# Altium PCB PCB2.PcbDoc
Units mil, origin at the board's own origin, x right, y up, seen from the top; angles counter-clockwise.
Board outline 6000 x 4000 mil, 2 copper layers (Top Layer, Bottom Layer); 6 components, 7 nets, 42 pads, 0 vias.
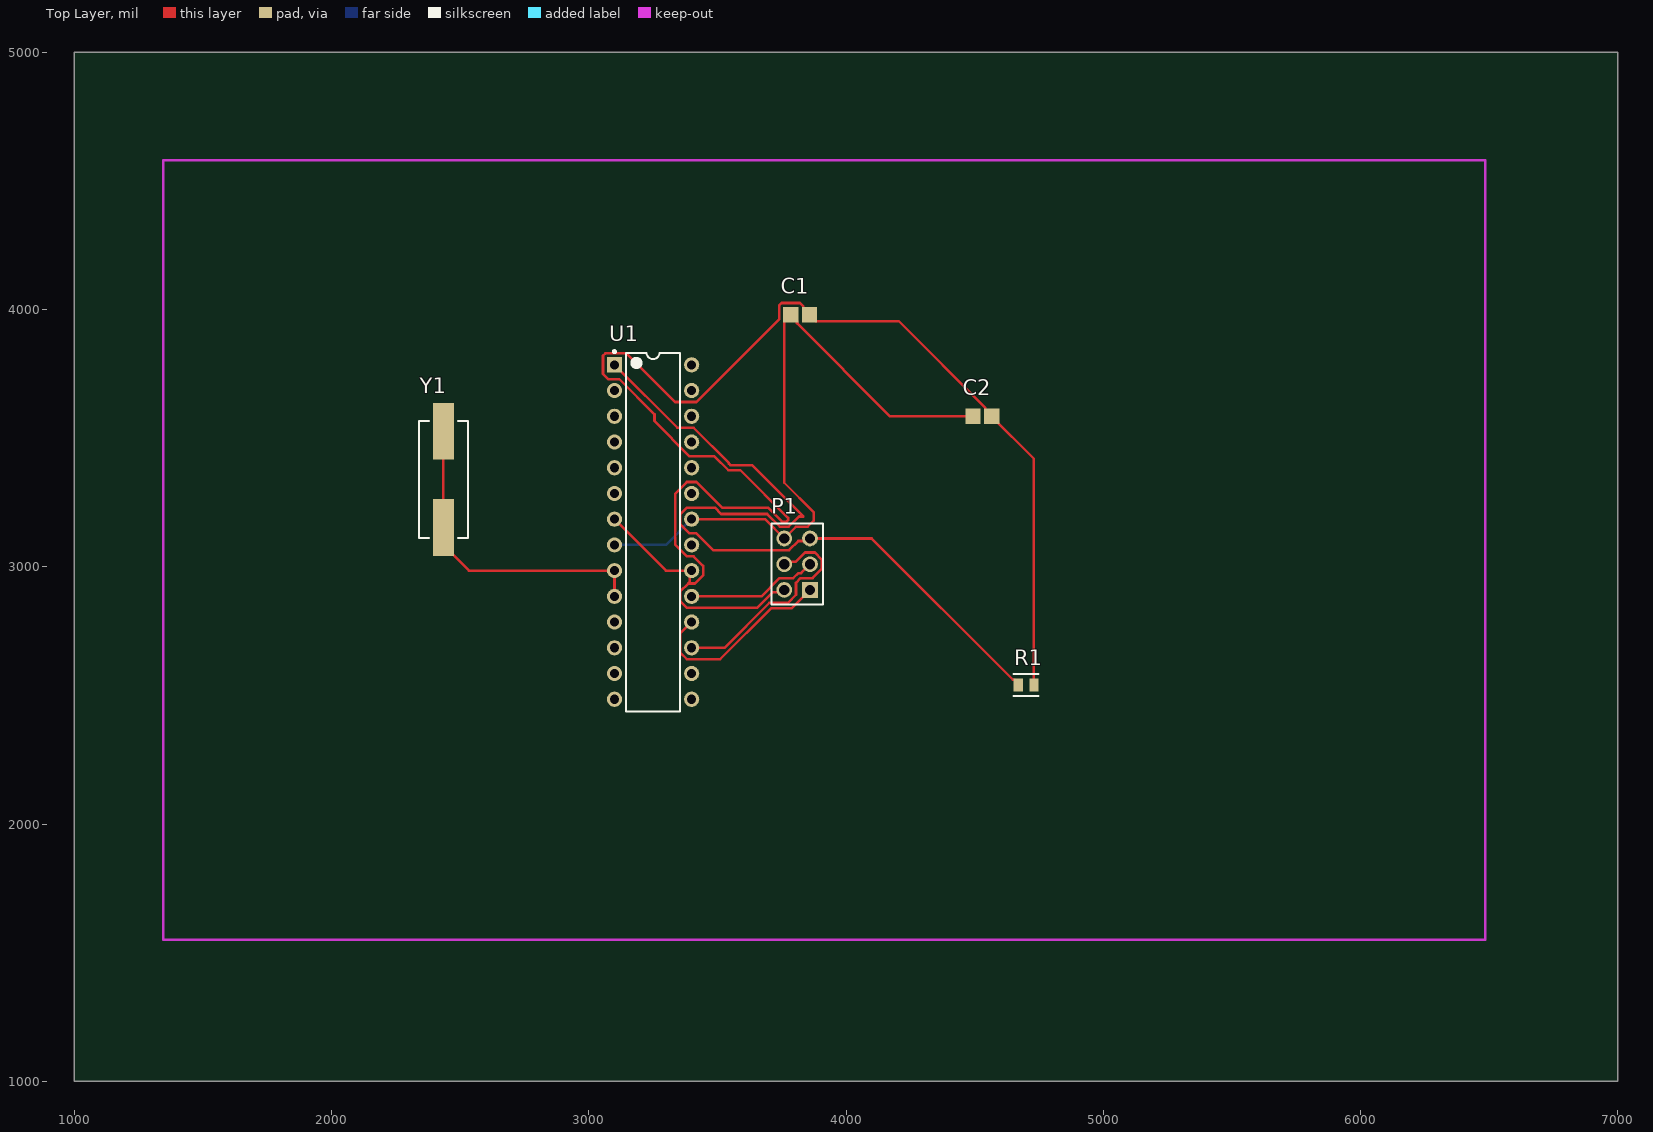
[diagram p0: Top Layer view]
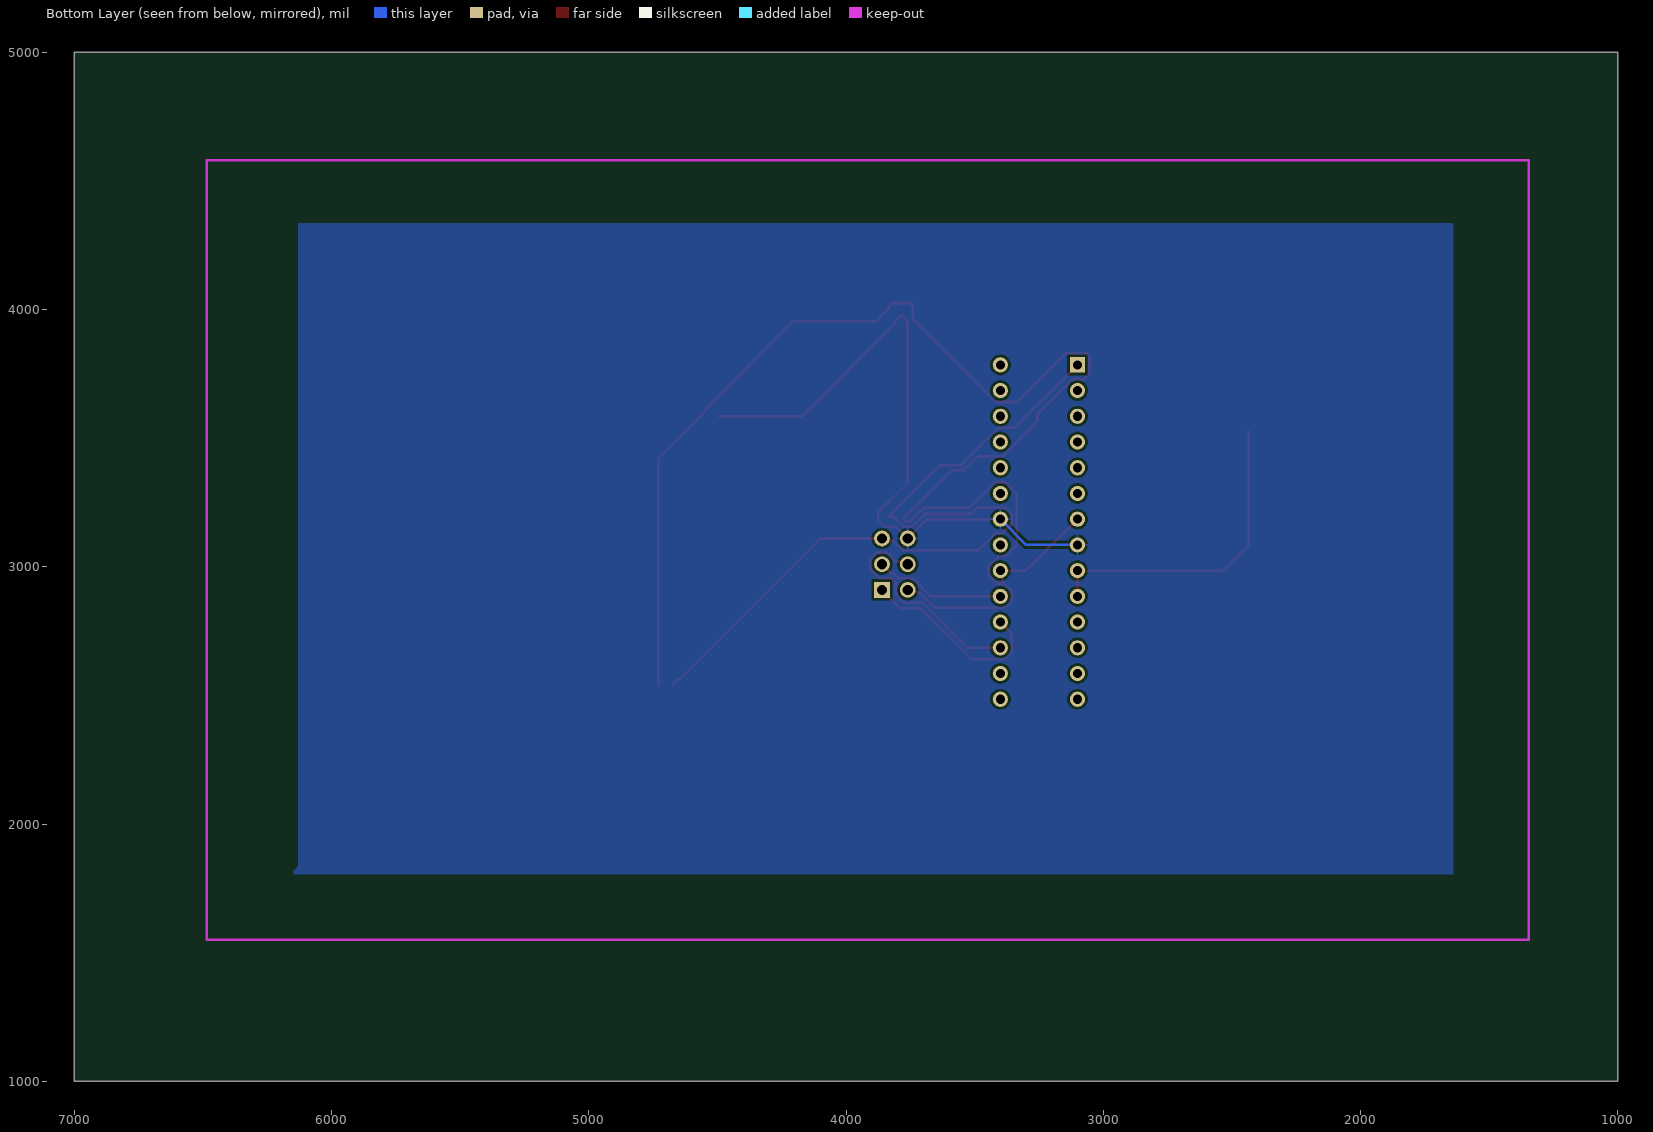
[diagram p1: Bottom Layer view, seen from below]
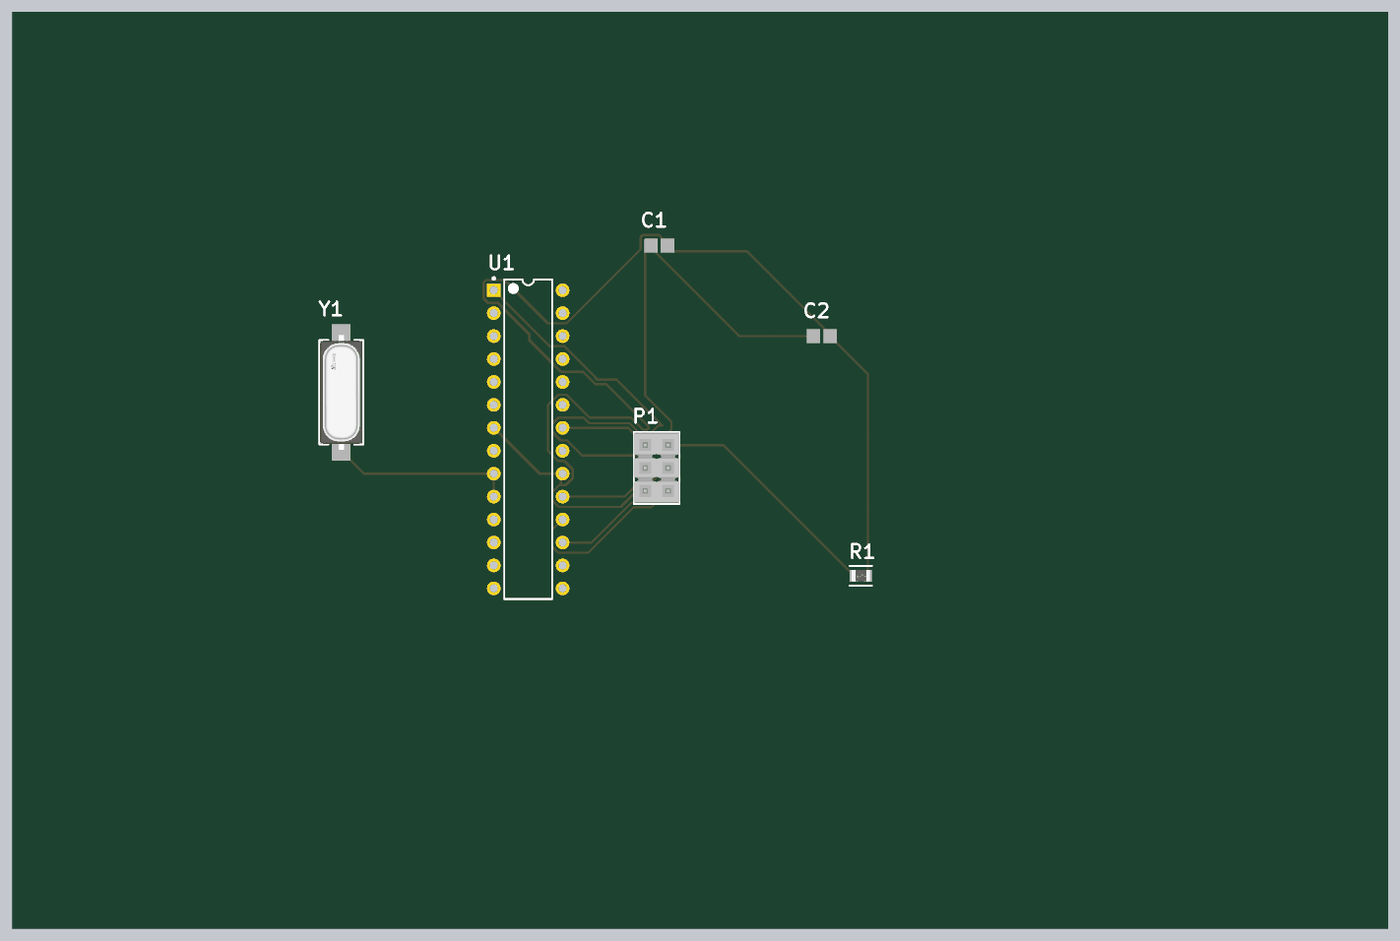
[diagram p2: 3D render of the assembled board from above, using the file's embedded part models]

## Layer stack, top to bottom
Top Solder: solder mask 0.4, Solder Resist, Dk 3.5
Top Layer: signal copper 1.4
Dielectric 1: dielectric 12.6, FR-4, Dk 4.8
Bottom Layer: signal copper 1.4
Bottom Solder: solder mask 0.4, Solder Resist, Dk 3.5

## Board outline
1000,1000 7000,1000 7000,5000 1000,5000

## Design rules (kind name [scope] priority, off if disabled: settings)
Clearance [All] p1: gap=10 ignorepadtopadclearanceinfootprint=FALSE
PolygonConnect [All] p1: connectstyle=Relief reliefconductorwidth=10 reliefentries=4 polygonreliefangle="90 Angle" airgapwidth=10
RoutingVias [All] p1: holewidth=28 width=50 viastyle="Through Hole" minholewidth=28 minwidth=50 maxholewidth=28 maxwidth=50
SolderMaskExpansion [All] p1: expansion=0 istentingtop=FALSE
SupplyNets "Schematic Supply Nets_1" [InNet('GND')] p1: voltage=0.000
SupplyNets "Schematic Supply Nets" [InNet('VCC')] p2: voltage=0.000
Width [All] p1: maxlimit=10 minlimit=10 preferedwidth=10
30 further rules are at their usual default settings.

## Components (designator, comment, footprint, x,y, rotation, side; value= is the part's Value field where it differs from the comment)
C1 "VJ0805Y104JXAAT" CAPC2013X145X48ML20T23 3821.42,3980 r0 top
C2 "VJ0805Y104JXAAT" CAPC2013X145X48ML20T23 4530,3585 r0 top
P1 "TSW-103-08-T-D" SMTC-TSW-103-08-X-D 3860,2910 r90 top
R1 "CRGCQ0805J10K" FP-CRGCQ0805-IPC_C 4700,2540 r0 top value=10KΩ
U1 "ATmega328P-PU" 28P3 3250,3135 r0 top
Y1 "ABLS-16.000MHZ-K4T" FP-ABLS-MFG 2435,3340 r90 top

## Footprints (in the part's own frame and the unit in brackets; to place one, negate y for a bottom-side part, rotate by r counter-clockwise, add the part's x,y. Pads: shape width x height; smd on the part's side, far side on the other; paste and mask are expansions set on the pad)
28P3 [mm] "28-Pin Plastic Dual In-Line Package (PDIP)"
  rect 1.5x1.5 hole 0.9: 1(-3.81,16.51)
  round 1.5 hole 0.9: 2(-3.81,13.97) 3(-3.81,11.43) 4(-3.81,8.89) 5(-3.81,6.35) 6(-3.81,3.81) 7(-3.81,1.27) 8(-3.81,-1.27) 9(-3.81,-3.81) 10(-3.81,-6.35) 11(-3.81,-8.89) 12(-3.81,-11.43) 13(-3.81,-13.97) 14(-3.81,-16.51) 15(3.81,-16.51) 16(3.81,-13.97) 17(3.81,-11.43) 18(3.81,-8.89) 19(3.81,-6.35) 20(3.81,-3.81) 21(3.81,-1.27) 22(3.81,1.27) 23(3.81,3.81) 24(3.81,6.35) 25(3.81,8.89) 26(3.81,11.43) 27(3.81,13.97) 28(3.81,16.51)
  silkscreen extent -3.93,-17.7 2.65,17.93, body extent -3.6,-17.65 3.6,17.65, height 4.58
CAPC2013X145X48ML20T23 [mm] "Chip Capacitor, 2-Leads, Body 2.00x1.25mm, IPC Low Density"
  rect 1.5x1.55 smd: 1(-0.925,0) 2(0.925,0)
  body extent -1.1,-0.72 1.1,0.72, height 1.45
FP-ABLS-MFG [mm]
  rect 5.6x2.1 smd paste+0 mask+0: 1(-4.75,0) 2(4.75,0)
  silkscreen extent -5.77,-2.42 5.77,2.42, body extent -7.65,-2.52 7.65,2.52, height 0.25
FP-CRGCQ0805-IPC_C [mil]
  rect 35.67x51.57 smd paste+0 mask+0: 1(-30.55,0) 2(30.55,0)
  silkscreen extent -48,-43 48,43, body extent -52,-31 52,31, height 10
SMTC-TSW-103-08-X-D [mm] ".025 SQ Post Terminal Strip Assembly, 2x3 Pins, Vertical, 2.54mm Pitch, Male"
  rect 1.55x1.55 hole 1.02: 1(0,0)
  round 1.55 hole 1.02: 2(0,2.54) 3(2.54,0) 4(2.54,2.54) 5(5.08,0) 6(5.08,2.54)
  silkscreen extent -1.46,-1.27 6.54,3.81, body extent -1.27,-1.27 6.35,3.81, height 8.38

## Part data
C1 C2: library part CMP-2007-03164-1, Manufacturer=Vitramon, Part Number=VJ0805Y104JXAAT
P1: library part CMP-1024-00335-1, "0.025\" SQ Post Header, Through-hole, Vertical, -55 to 105 degC, 2.54 mm Pitch, 6-Pin, Male, RoHS", Manufacturer=Samtec, Temperature Range="-55 to 105 degC", ComponentLink1Description="Manufacturer URL", ComponentLink1URL=http://www.samtec.com, ComponentLink2Description=Datasheet, ComponentLink2URL=http://www.samtec.com/documents/webfiles/pdf/TSW_TH.PDF, ComponentLink3Description="Package Specification", ComponentLink3URL=http://www.samtec.com/documents/webfiles/cpdf/TSW-XXX-XX-XXX-X-XX-XXX-MKT.pdf, DatasheetVersion=F-214, Mounting Technology=Through-hole, Orientation=Vertical, PackageDescription=".025[0.64] SQ. Post Terminal Strip Assembly", PackageReference=TSW-103-08-X-D, PackageVersion="DM, 8/1988", PartNumber=TSW-103-08-T-D, Pitch="2.54 mm", RoHS=True
R1: library part CMP-03211-002989-1, "CRGCQ 0805 10K 5%", Ambient Temperature Range High=+70°C, Manufacturer="TE Connectivity", Package=CRGCQ0805, Power Rating=0.125W, Resistance=10KΩ, Temperature="-55°C to +155°C", Temperature Coefficient=±100ppm/°C, Temperature Range High=+155°C, Temperature Range Low=-55°C, Tolerance=0.05, Voltage Rating=150V, Automotive=Yes, Automotive Grade="Grade 914", Category=Res, ComponentLink2Description=Datasheet, ComponentLink2URL=https://www.te.com/commerce/DocumentDelivery/DDEController?Action=showdoc&DocId=Data+Sheet%7F1773204-3%7F1%7Fpdf%7FEnglish%7FENG_DS_1773204-3_1.pdf%7F4-2176341-923, Composition="Thick Film", Device Class L1="Passive Components", Device Class L2=Resistors, Device Class L3="Chip SMD Resistors", Digikey Description="CRGCQ 0805 10K 5%", Height=0.65mm, Ipc Land Pattern Name=RESC200125X55, Lead Free=Yes, Manufacturer Part Number=CRGCQ0805J10K, Mouser Description="Res Thick Film 0805 10K Ohm 5% 0.125W(1/8W) ±100ppm/C Pad SMD Automotive T/R", Octopart=https://octopart.com/crgcq0805j10k-te+connectivity-91018201, RoHS=TRUE, Series=CRGCQ
U1: library part CMP-0095-00013-2, "8-bit AVR Microcontroller, 32KB Flash, 1KB EEPROM, 2KB SRAM, 28-pin PDIP, Industrial Grade (-40°C to 85°C)", ComponentLink1Description="Manufacturer URL", ComponentLink1URL=http://www.atmel.com/, ComponentLink2Description="ATmega48A/48PA/88A/88PA/168A/168PA/328/328P Datasheet", ComponentLink2URL=http://www.atmel.com/dyn/resources/prod_documents/8271.pdf, ComponentLink3Description="ATmega48A/48PA/88A/88PA/168A/168PA/328/328P Summary", ComponentLink3URL=http://www.atmel.com/dyn/resources/prod_documents/8271S.pdf, DatasheetVersion="revD, May-2011", PackageDescription="28-lead (0.300\"/7.62mm Wide) Plastic Dual Inline Package (PDIP)", PackageReference=28P3, PackageVersion="revB, Sep-2001", RevisionNote="DatasheetVersion updated. URLs added."
Y1: library part CMP-27762-000003-1, "CRYSTAL 16.0000MHZ 18PF SMD", Frequency=16MHz, Load Capacitance=18pF, Manufacturer=Abracon, Package=ABLS, Temperature="-40°C to +125°C", Temperature Range High=+125°C, Temperature Range Low=-40°C, Tolerance=30ppm, Automotive=No, Category=Crys, ComponentLink2Description=Datasheet, ComponentLink2URL=https://abracon.com/Resonators/abls.pdf, Device Class L1="Passive Components", Device Class L2="Crystals / Oscillators", Device Class L3=Crystals, Digikey Description="CRYSTAL 16.0000MHZ 18PF SMD", Esr=40Ω, Height=4.3mm, Lead Free=Yes, Manufacturer Part Number=ABLS-16.000MHZ-K4T, Mouser Description="Crystal 16MHz ±30ppm (Tol) ±50ppm (Stability) 18pF FUND 40Ohm 2-Pin HC-49/US SMD T/R", Octopart=https://octopart.com/abls-16.000mhz-k4t-abracon-18618626, RoHS=TRUE, Series=ABLS, Stability=50ppm, Standoff Height=0mm

## Nets (pads, with @x,y where several pads share a name; then routed paths per layer and width w, separated by ;. In a path a pad name is that pad's centre, name@x,y a point inside that pad or via, vN(x,y) a via of type N, cw(c..) or ccw(c..) an arc to the next point about the centre after c; other vN are vias at no path point)
GND: C1.1 C2.1 P1.6 U1.8 U1.22 | length 2609.5
  Top Layer w10: U1.22 3685,3185 P1.6 3805.51,3155.51 3851.06,3155.51 3874.49,3178.94 3874.49,3212.08 3760,3326.57 3760,3954.02 3785,3979.02 3809.53,3954.49 3809.53,3947.05 4171.58,3585 C2.1
  Bottom Layer w10: U1.8 3300,3085 U1.22
MISO: P1.1 U1.18 | length 763.9
  Top Layer w10: U1.18 3355.47,2740.47 3355.47,2666.56 3381.56,2640.47 3510.96,2640.47 3709.93,2839.44 3789.44,2839.44 P1.1
MOSI: P1.4 U1.17 | length 872.7
  Top Layer w10: U1.17 3527.2,2685 3701.64,2859.44 3773.8,2859.44 3805.51,2891.15 3805.51,2937.75 3823.28,2955.51 3869.88,2955.51 3905.51,2991.15 3905.51,3028.85 3878.85,3055.51 3841.15,3055.51 3805.4,3019.76 3769.76,3019.76 P1.4
NetU1_9: U1.9 U1.10 Y1.1 Y1.2 | length 1249
  Top Layer w10: Y1.2 Y1.1 2435,3084.09 2534.09,2985 U1.9 U1.10
RESET: P1.5 R1.1 U1.1 | length 3211.3
  Top Layer w10: U1.1 3344.53,3540.47 3407.5,3540.47 3544.84,3403.13 3544.84,3401.01 3550.7,3395.16 3634.84,3395.16 3834.49,3195.51 3817.23,3195.51 3777.23,3155.51 3742.77,3155.51 3693.28,3205 3514.69,3205 3490.16,3229.53 3381.56,3229.53 3355.47,3203.44 3355.47,3166.56 3392.5,3129.53 3418.44,3129.53 3483.48,3064.49 3778.85,3064.49 3814.6,3100.24 3840.35,3100.24 3869.76,3129.65 3869.76,3119.76 P1.5 4099.45,3110 4648.66,2560.78 4656.61,2560.78 4669.45,2547.95 R1.1
SCK: P1.3 U1.19 | length 511.8
  Top Layer w10: U1.19 3670.64,2885 3741.15,2955.51 3794.99,2955.51 3814.99,2975.51 3825.51,2975.51 P1.3
VCC: C1.2 C2.2 P1.2 R1.2 U1.7 U1.20 | length 6070.5
  Top Layer w10: U1.7 3300,2985 U1.20 3392.5,2977.5 3392.5,2940.47 3387.03,2935 ; P1.2 3750.57,2900.57 3714.49,2900.57 3654.39,2840.47 3381.56,2840.47 3355.47,2866.56 3355.47,2903.44 3387.03,2935 ; C1.2@3857.83,3979.02 3882.36,3954.49 4205.35,3954.49 4541.89,3617.95 4541.89,3609.53 C2.2 ; C1.2 3833.31,4004.53 3833.31,4012.95 3820.74,4025.51 3749.26,4025.51 3740,4016.25 3740,3962.03 3418.44,3640.47 3335.88,3640.47 3146.82,3829.53 3064.26,3829.53 3055.47,3820.74 3055.47,3749.26 3075.2,3729.53 3118.44,3729.53 3255.47,3592.5 3255.47,3566.56 3392.5,3429.53 3488.05,3429.53 3542.42,3375.16 3589.3,3375.16 3774.8,3189.65 3774.8,3181.37 3768.94,3175.51 3751.06,3175.51 3697.04,3229.53 3518.44,3229.53 3418.44,3329.53 3381.56,3329.53 3335.47,3283.44 3335.47,3086.56 3381.56,3040.47 3407.5,3040.47 3444.53,3003.44 3444.53,2966.56 3412.97,2935 3387.03,2935 ; C2.2@4566.42,3584.02 4730.55,3419.88 R1.2
pads on no net: U1.2 U1.3 U1.4 U1.5 U1.6 U1.11 U1.12 U1.13 U1.14 U1.15 U1.16 U1.21 U1.23 U1.24 U1.25 U1.26 U1.27 U1.28

## Polygon pours and split planes (outlines as drawn)
GND on Bottom Layer "GND_L02_P004" (solid, pour order 4): 1640,4340 1645,4335 6130,4335 6130,1835 6155,1810 6150,1805 1640,1805

## Keep-outs
Keep-Out Layer:
  lines w10: 1345,1550 6485,1550 6485,4580 1345,4580 1345,1550